# Altium PCB main.PcbDoc (part 1 of 2)
Units mm, origin at the board's own origin, x right, y up, seen from the top; angles counter-clockwise.
Board outline 98 x 96 mm, 4 copper layers (Top Layer, PWR Layer, GND Layer, Bottom Layer), stack 0.603 mm thick; 82 components, 71 nets, 386 pads, 153 vias.
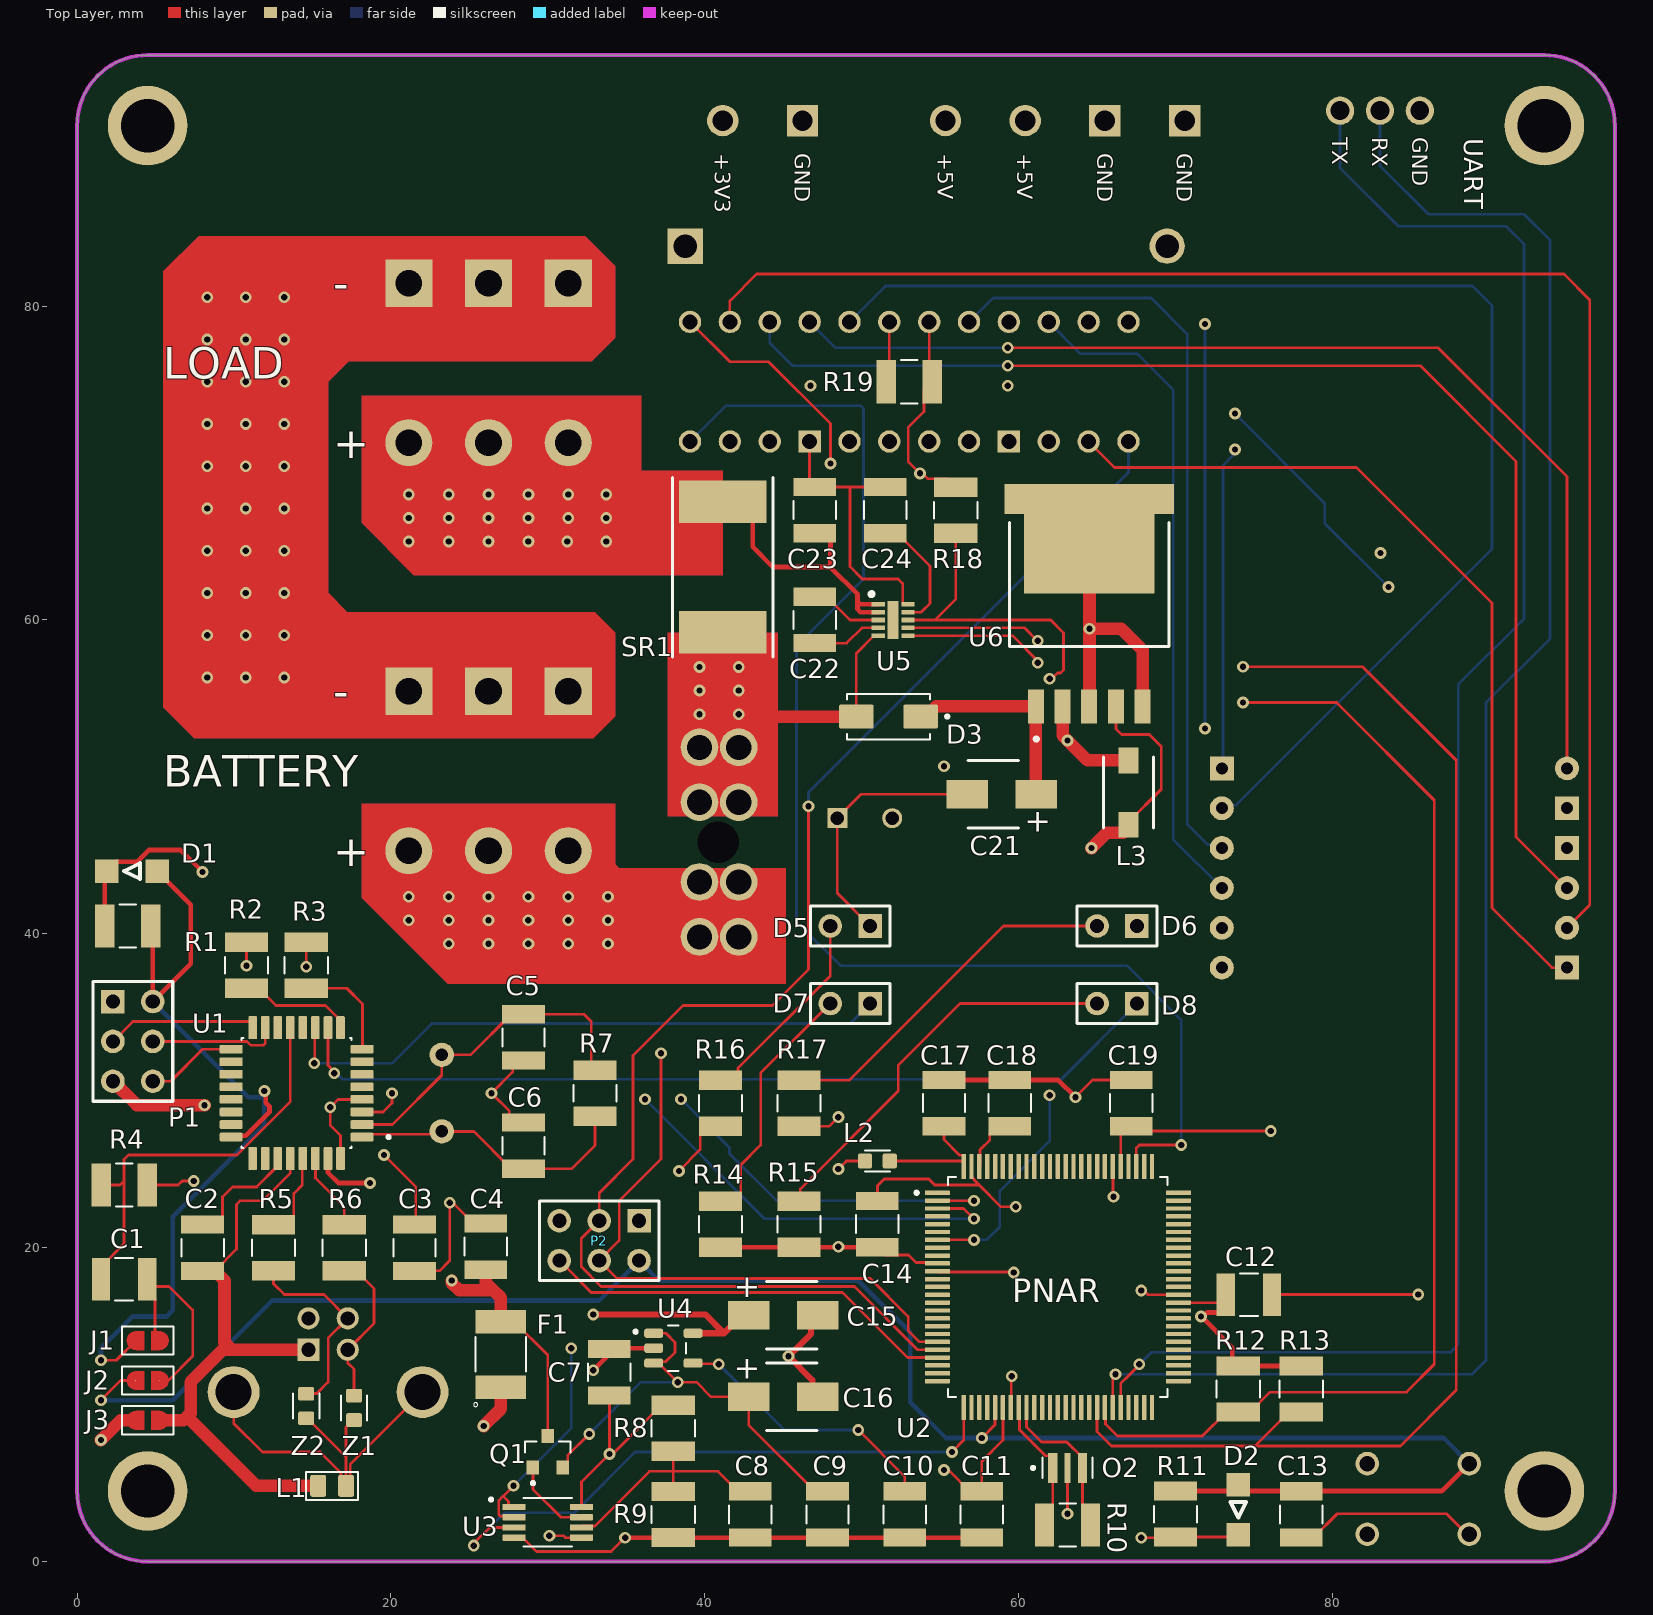
[diagram p0: Top Layer view]
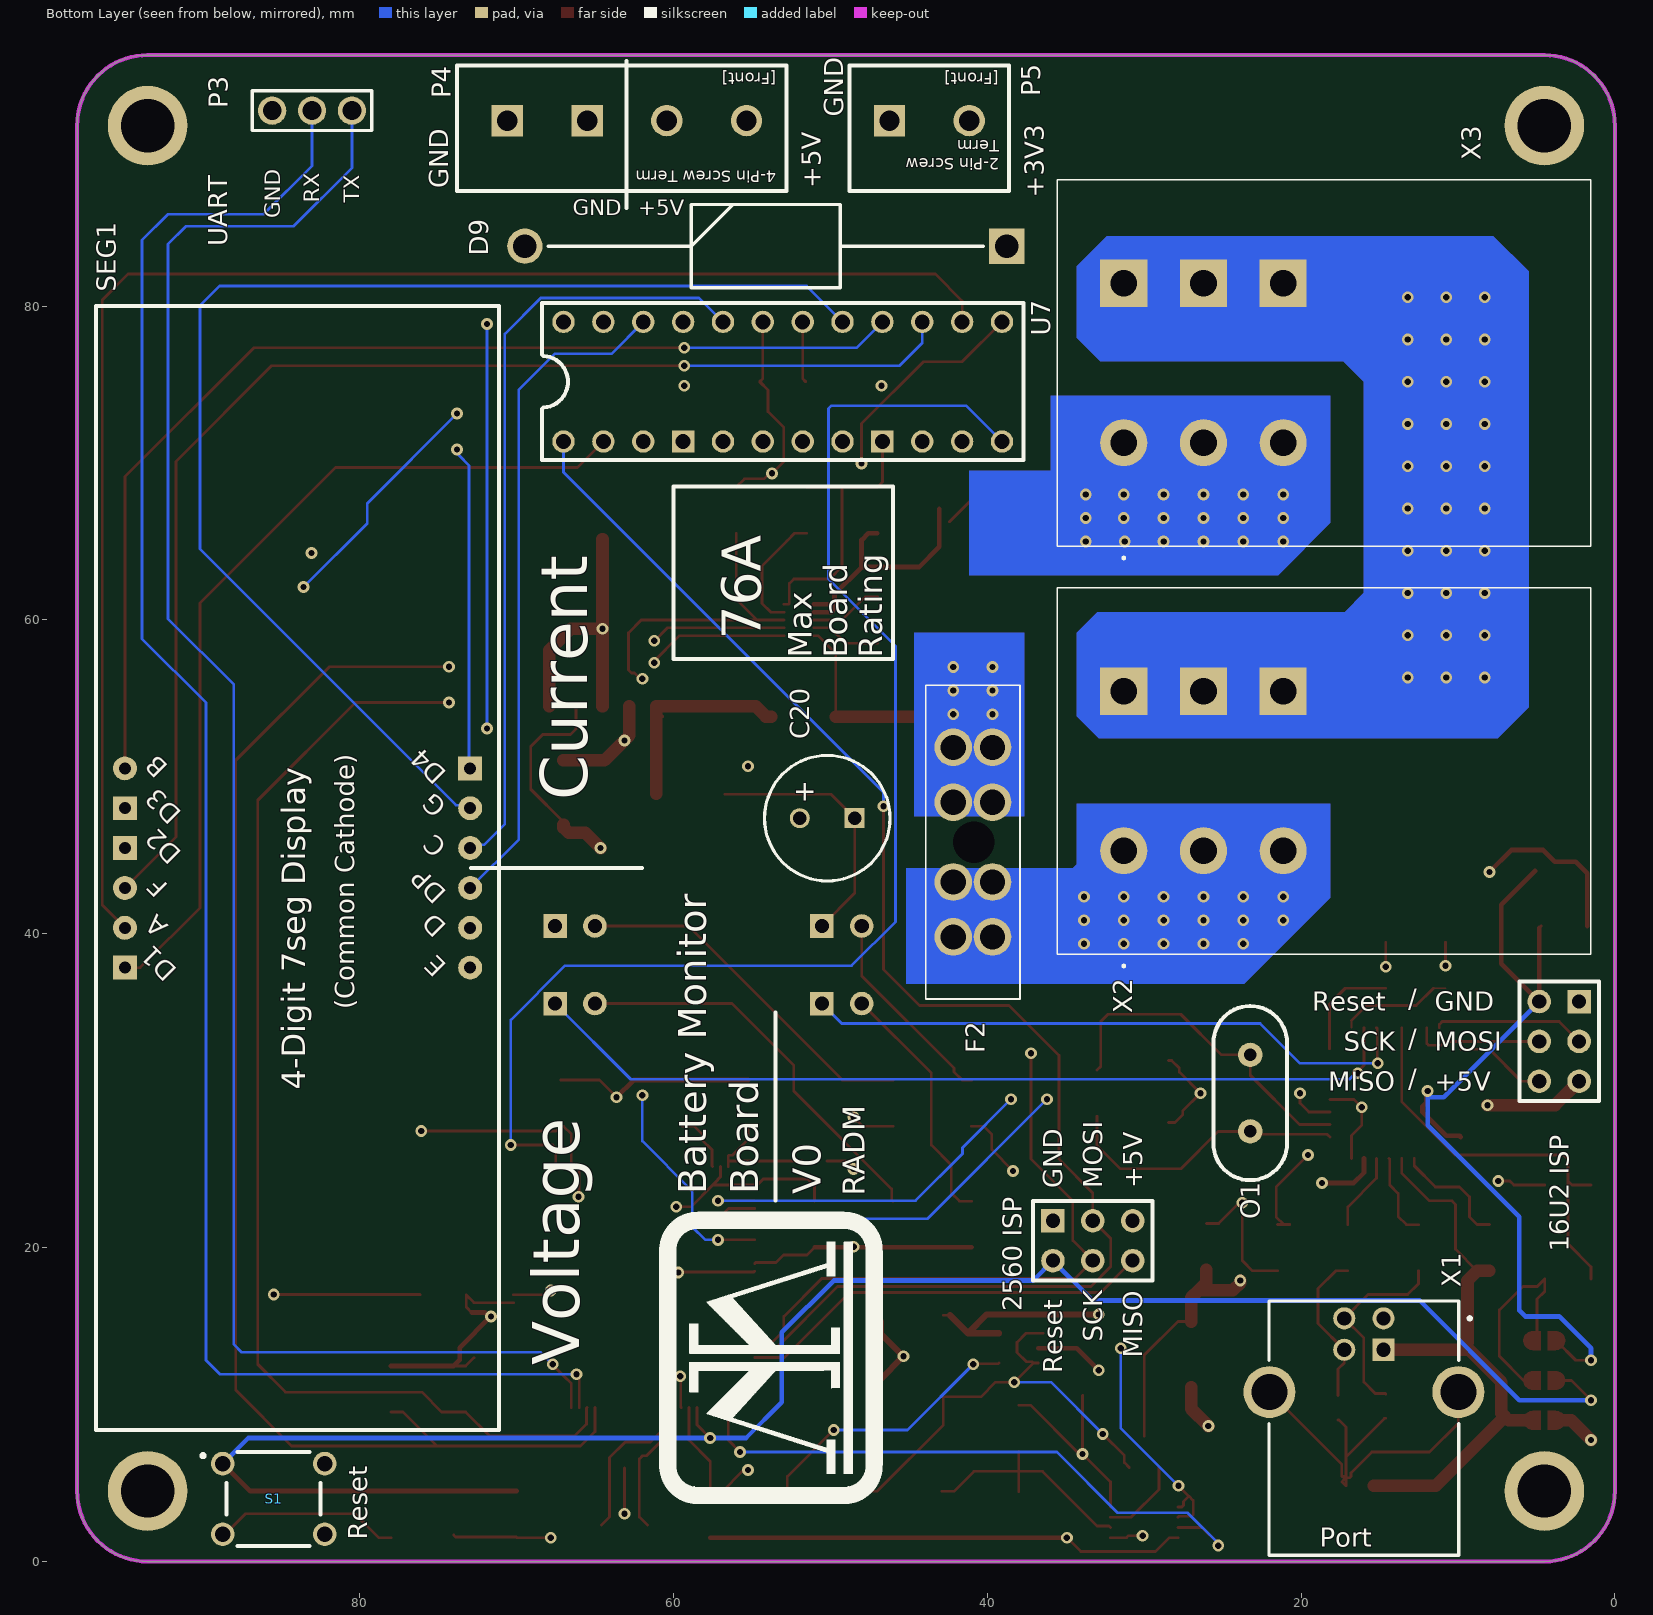
[diagram p1: Bottom Layer view, seen from below]
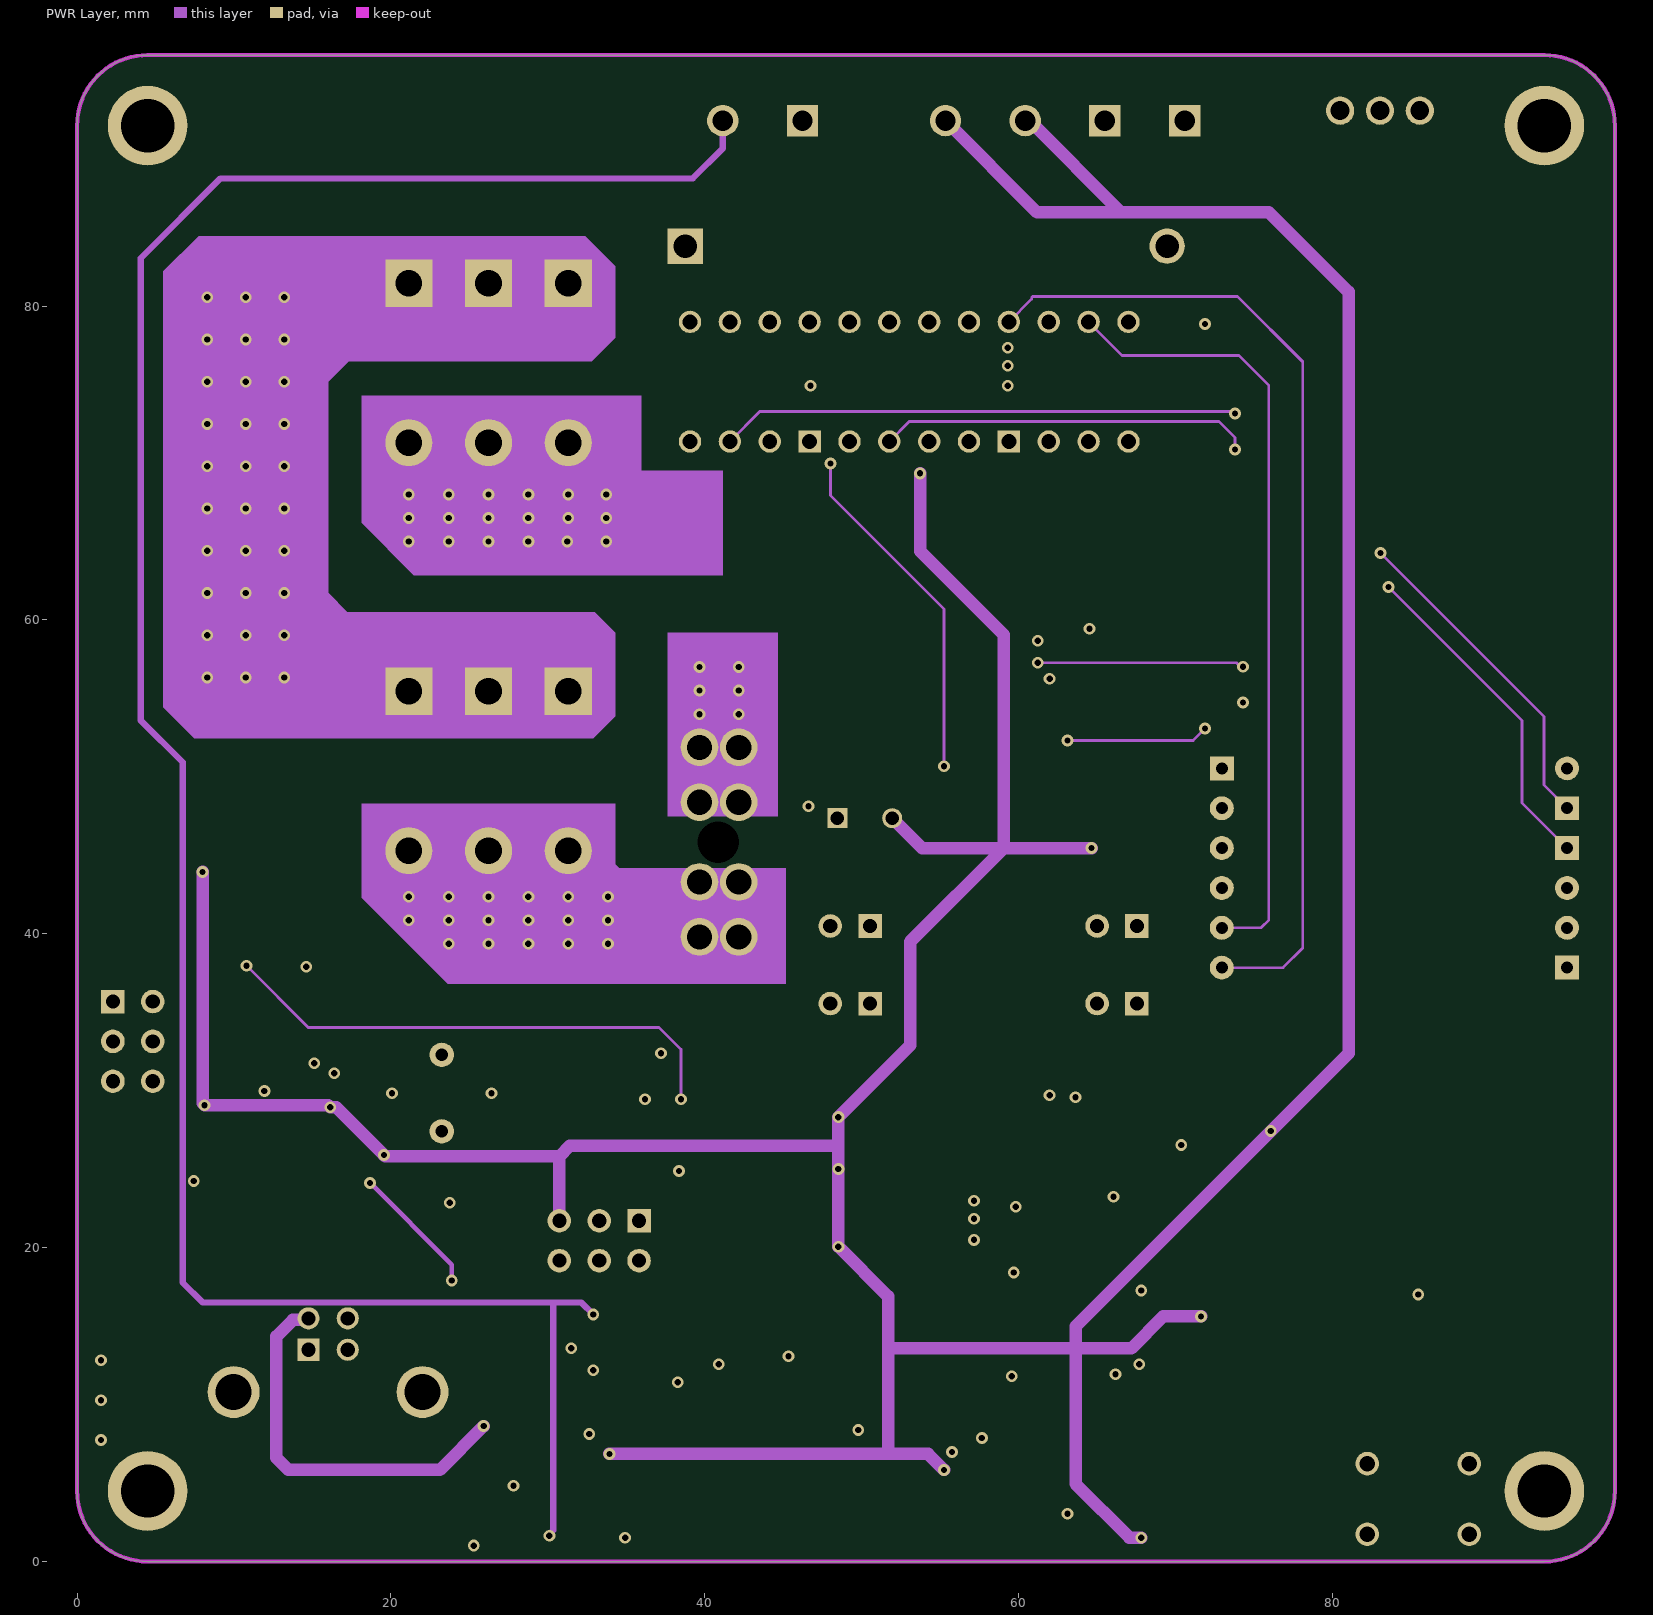
[diagram p2: PWR Layer]
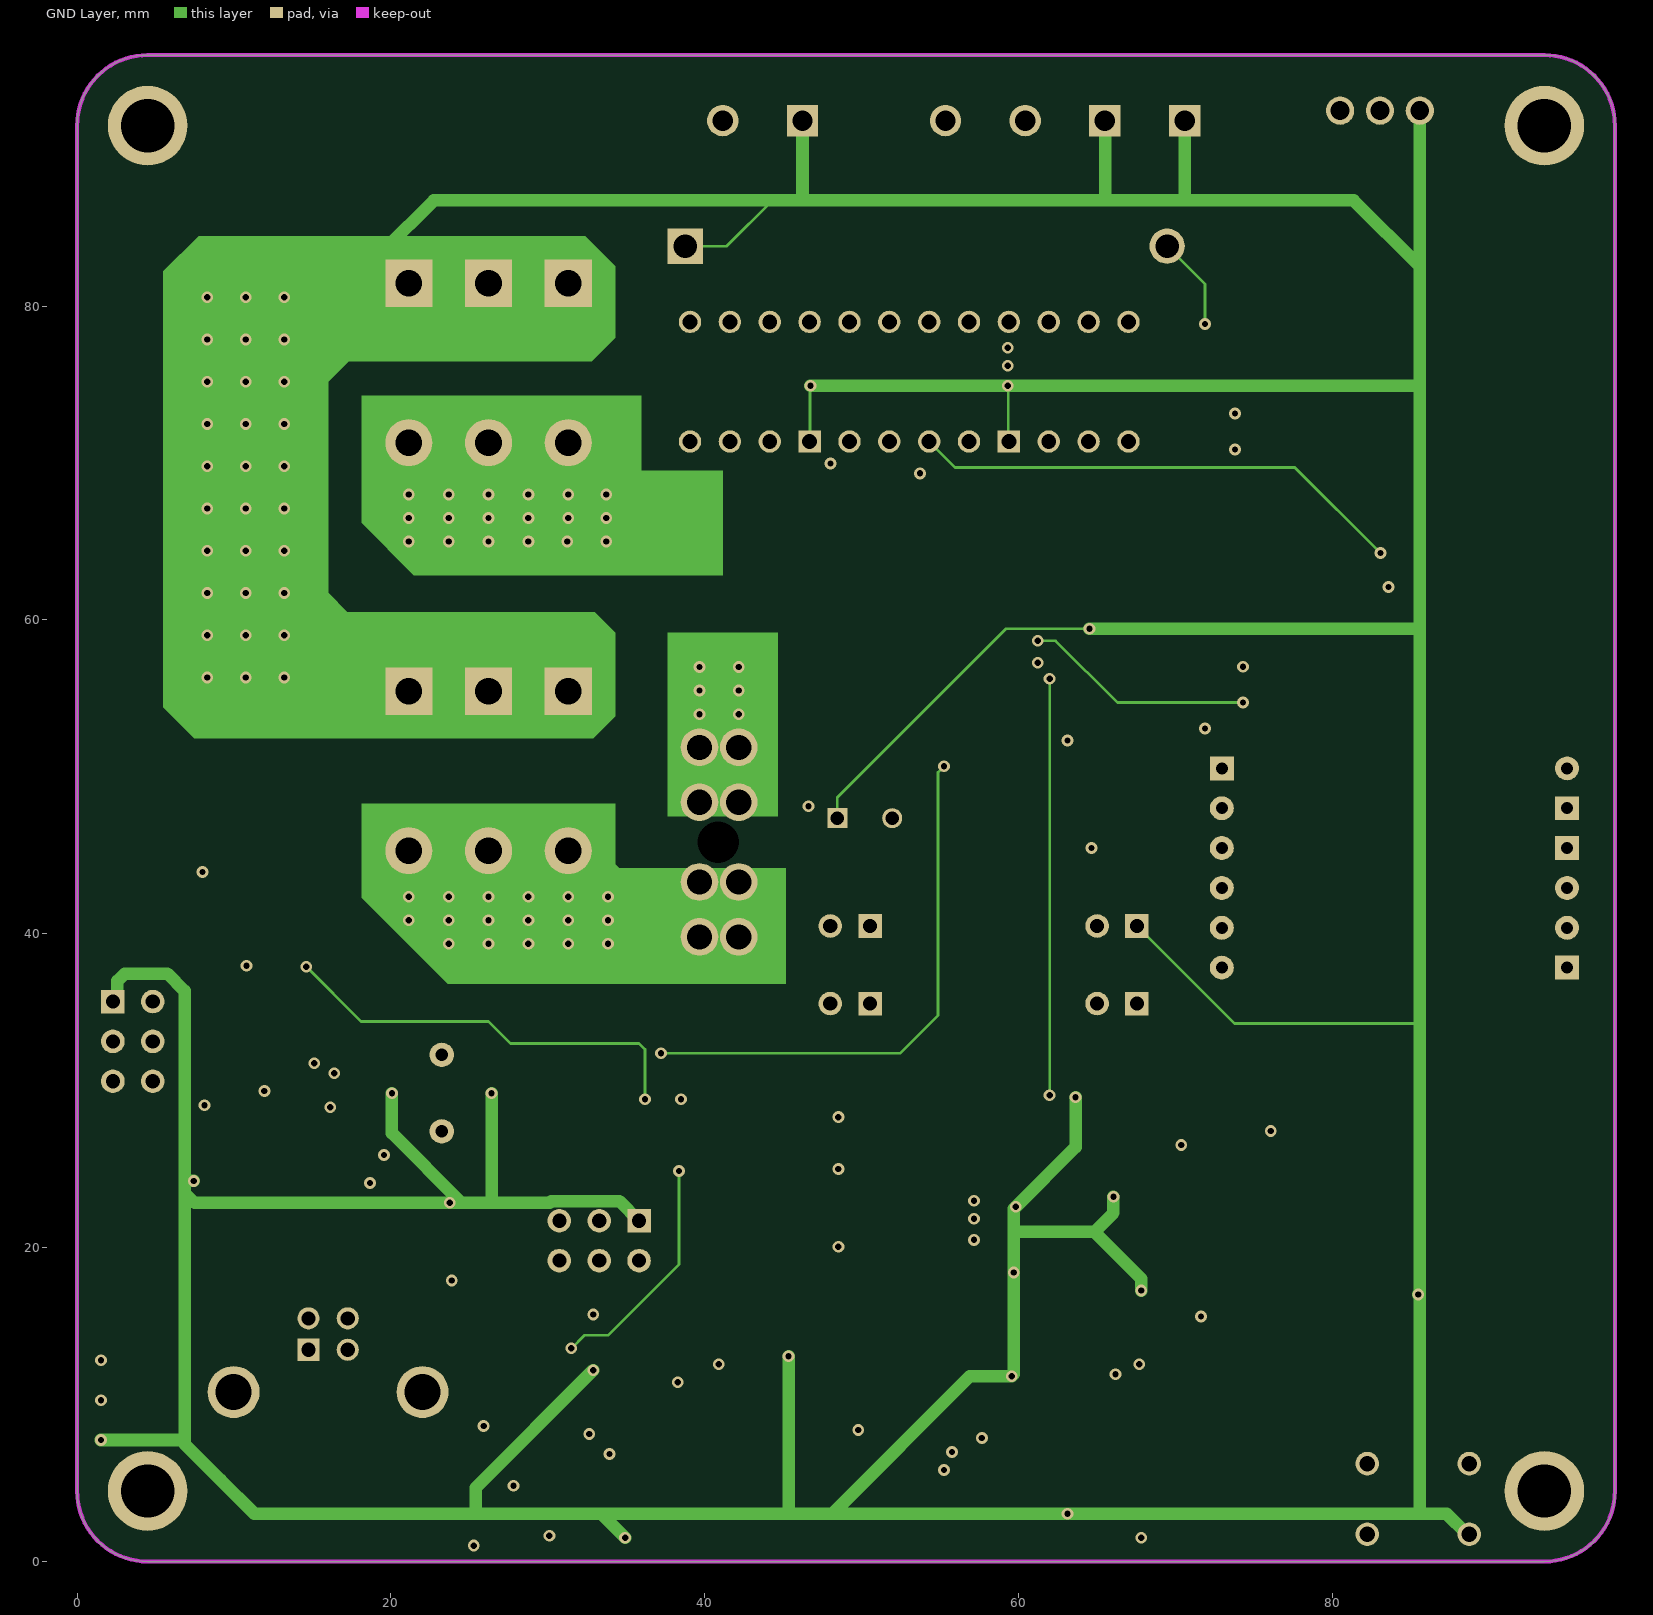
[diagram p3: GND Layer]

## Layer stack, top to bottom
Top Solder: solder mask 0.0102, Solder Resist, Dk 3.5
Top Layer: signal copper 0.0356
Dielectric 2: prepreg 0.0711, PP-006, Dk 4.1
PWR Layer: signal copper 0.035
Dielectric 1: dielectric 0.32, FR-4, Dk 4.8
GND Layer: signal copper 0.035
Dielectric 3: prepreg 0.0711, PP-006, Dk 4.1
Bottom Layer: signal copper 0.0356
Bottom Solder: solder mask 0.0102, Solder Resist, Dk 3.5

## Board outline
0,4.5 0,91.5 cw(c4.5,91.5) 4.5,96 93.5,96 cw(c93.5,91.5) 98,91.5 98,4.5 cw(c93.5,4.5) 93.5,0 4.5,0 cw(c4.5,4.5)

## Design rules (kind name [scope] priority, off if disabled: settings)
BoardOutlineClearance [All] p1: gap=0.2 ignorepadtopadclearanceinfootprint=FALSE
Clearance [All] p1: gap=0.102 ignorepadtopadclearanceinfootprint=FALSE except(0.127: Arc-Via Track-Via SMDPad-Via THPad-Via Via-Via Via-Fill Via-Poly Via-Region Via-Text; 0.25: Arc-Hole Track-Hole SMDPad-Hole THPad-Hole Via-Hole Fill-Hole Poly-Hole Region-Hole Text-Hole)
ComponentClearance [All] p1: gap=0.102 collisioncheckmode=3 verticalgap=0.102 showdistances=TRUE
DiffPairsRouting [All] p1: maxlimit=0.102 minlimit=0.102 mostfreqgap=0.102 toplayer_minwidth=0.102 toplayer_maxwidth=1816.048 toplayer_prefwidth=0.102 midlayer1_minwidth=0.102 midlayer1_maxwidth=1816.048 midlayer1_prefwidth=0.102 midlayer2_minwidth=0.102 midlayer2_maxwidth=1816.048 midlayer2_prefwidth=0.102 bottomlayer_minwidth=0.102 bottomlayer_maxwidth=1816.048 bottomlayer_prefwidth=0.102 maxuncoupledlength=12.7
Height [All] p1: minheight=0 maxheight=1816.048 prefheight=12.7
HoleSize [All] p1: absolutevalues=TRUE maxlimit=6.3 minlimit=0.2 maxpercent=80.000 minpercent=20.000
HoleToHoleClearance [All] p1: gap=0.25 allowstackedmicrovias=FALSE
MinimumAnnularRing [All] p1: minimumring=0.076
MinimumSolderMaskSliver [All] p1: minsoldermaskwidth=0
PlaneClearance [All] p1: clearance=0.102
PlaneConnect PlaneConnectPowerPads [InPadClass('PowerPads')] p1: planeconnectstyle=Direct reliefexpansion=0.508 reliefentries=4 reliefconductorwidth=0.254 reliefairgap=0.254
PlaneConnect [All] p2: pad.planeconnectstyle=Relief pad.reliefexpansion=0.3 pad.reliefentries=4 pad.reliefconductorwidth=0.102 pad.reliefairgap=0.102 via.planeconnectstyle=Direct via.reliefexpansion=0.3 via.reliefentries=4 via.reliefconductorwidth=0.127 via.reliefairgap=0.127
PolygonConnect PolygonConnectPowerPads [All vs (InPadClass('PowerPads'))] p1: connectstyle=Direct reliefconductorwidth=0.254 reliefentries=4 polygonreliefangle="90 Angle" airgapwidth=0.254
PolygonConnect [All] p2: thpad.connectstyle=Relief thpad.reliefconductorwidth=0.102 thpad.reliefentries=4 thpad.polygonreliefangle="90 Angle" thpad.airgapwidth=0.102 smdpad.connectstyle=Relief smdpad.reliefconductorwidth=0.102 smdpad.reliefentries=4 smdpad.polygonreliefangle="90 Angle" smdpad.airgapwidth=0.102 via.connectstyle=Direct via.reliefconductorwidth=0.127 via.reliefentries=4 via.polygonreliefangle="90 Angle" via.airgapwidth=0.127
RoutingVias [All] p1: holewidth=0.2 width=0.45 viastyle="Through Hole" minholewidth=0.2 minwidth=0.45 maxholewidth=6.3 maxwidth=6.55
SilkToSilkClearance [All] p1: silktosilkclearance=0
SilkToSolderMaskClearance [IsPad] p1: minsilkscreentomaskgap=0.102 clearancetoexposedcopper=TRUE
SolderMaskExpansion [All] p1: expansion=0.075 istentingtop=FALSE
SupplyNets "Schematic Supply Nets_3" [InNet('16U2_AVCC')] p1: voltage=0.000
SupplyNets "Schematic Supply Nets_2" [InNet('U3 GND')] p2: voltage=0.000
SupplyNets "Schematic Supply Nets_1" [InNet('+3V3')] p3: voltage=0.000
Width [All] p1: maxlimit=1816.048 minlimit=0.102 preferedwidth=0.175
20 further rules are at their usual default settings.

## Classes and differential pairs
component class "Seven-Seg Displays": R19 SEG1 U7
component class "USB Programmer": C1 C2 C3 C4 C5 C6 D1 D7 D8 F1 J1 J2 J3 L1 O1 P1 R1 R2 R3 R4 R5 R6 R7 R14 R15 U1 X1 Z1 Z2
component class "Primary MCU": C7 C8 C9 C10 C11 C12 C13 C14 C15 C16 C17 C18 C19 D2 D5 D6 L2 O2 P2 P3 Q1 R8 R9 R10 R11 R12 R13 R16 R17 S1 U2 U3 U4
component class "DC Step-Down Converter": C20 C21 D3 D9 L3 P4 P5 U6
component class "Battery Monitoring": C22 C23 C24 F2 R18 SR1 U5 X2 X3

## Components (designator, comment, footprint, x,y, rotation, side; value= is the part's Value field where it differs from the comment)
C1 "SMD Cap - Nonpolarized" "SMD Capacitor [1210]" 3,18 r0 top
C2 "SMD Cap - Nonpolarized" "SMD Capacitor [1210]" 8,20 r90 top
C3 "SMD Cap - Nonpolarized" "SMD Capacitor [1210]" 21.5,20 r90 top
C4 "SMD Cap - Nonpolarized" "SMD Capacitor [1210]" 26.035,20.066 r90 top
C5 "SMD Cap - Nonpolarized" "SMD Capacitor [1210]" 28.448,33.401 r270 top
C6 "SMD Cap - Nonpolarized" "SMD Capacitor [1210]" 28.448,26.5 r90 top
C7 "SMD Cap - Nonpolarized" "SMD Capacitor [1210]" 33.909,12.065 r270 top
C8 "SMD Cap - Nonpolarized" "SMD Capacitor [1210]" 42.9,3 r90 top
C9 "SMD Cap - Nonpolarized" "SMD Capacitor [1210]" 47.819,3 r90 top
C10 "SMD Cap - Nonpolarized" "SMD Capacitor [1210]" 52.739,3 r90 top
C11 "SMD Cap - Nonpolarized" "SMD Capacitor [1210]" 57.658,3 r90 top
C12 "SMD Cap - Nonpolarized" "SMD Capacitor [1210]" 74.675,17 r180 top
C13 "SMD Cap - Nonpolarized" "SMD Capacitor [1210]" 78,3 r90 top
C14 "SMD Cap - Nonpolarized" "SMD Capacitor [1210]" 51,21.5 r270 top
C15 "SMD Cap - Polarized" "SMD Cap - Polarized, 4mm" 45,15.7 r0 top
C16 "SMD Cap - Polarized" "SMD Cap - Polarized, 4mm" 45,10.5 r0 top
C17 "SMD Cap - Nonpolarized" "SMD Capacitor [1210]" 55.245,29.21 r270 top
C18 "SMD Cap - Nonpolarized" "SMD Capacitor [1210]" 59.436,29.21 r270 top
C19 "SMD Cap - Nonpolarized" "SMD Capacitor [1210]" 67.183,29.21 r270 top
C20 "Thru-Hole Cap - Polarized" "Thru-Hole Polarized Cap [3.5mm]" 50.193,47.353 r180 bottom
C21 "SMD Cap - Polarized" "SMD Cap - Polarized, 4mm" 58.928,48.895 r180 top
C22 "SMD Cap - Nonpolarized" "SMD Capacitor [1210]" 47,60 r270 top
C23 "SMD Cap - Nonpolarized" "SMD Capacitor [1210]" 47,67.001 r270 top
C24 "SMD Cap - Nonpolarized" "SMD Capacitor [1210]" 51.5,67 r90 top
D1 "SMD Diode" "SMD Diode [1206]" 3.5,44 r180 top
D2 "SMD Diode" "SMD Diode [1206]" 74,3.295 r270 top
D3 "SMD M7 Rectifier" "SMD M7 Rectifier" 51.707,53.848 r180 top
D5 "LED" "Small Yellow LED" 48,40.5 r0 top
D6 "LED" "Small Green LED" 65,40.5 r0 top
D7 "LED" "Small Yellow LED" 48,35.56 r0 top
D8 "LED" "Small Yellow LED" 65,35.56 r0 top
D9 "1N5822" "1N5822 Schottky Diode" 54.113,83.82 r180 bottom
F1 "SMD 500mA Resetable Fuse" "SMD 500mA Resetable Fuse" 27,13.197 r90 top
F2 "Blade Fuse" "Blade Fuse [2]" 40.914,45.847 r270 bottom
J1 "Solderable Jumper" "Solderable Jumper" 4.5,14.08 r180 top
J2 "Solderable Jumper" "Solderable Jumper" 4.5,11.54 r180 top
J3 "Solderable Jumper" "Solderable Jumper" 4.5,9 r0 top
L1 "SMD Ferrite Bead" "SMD Ferrite Bead [0805]" 16.256,4.826 r180 top
L2 "SMD Inductor" "SMD Inductor [0603]" 51,25.527 r180 top
L3 "SMD Inductor" "SMD Inductor [1812]" 67,49 r270 top
O1 "Thru-Hole 16MHz Oscillator" "Thru-Hole 16MHz Oscillator" 23.241,29.851 r90 bottom
O2 "SMD 16MHz Oscillator" "SMD 16MHz Oscillator [1]" 63.119,5.969 r0 top
P1 "Header 3X2" HDR2X3 4.826,30.607 r90 top
P2 "Header 3X2" HDR2X3 30.734,19.177 r0 top
P3 "JST Female 3 Pin" "Jst Female 3pin" 80.486,92.456 r0 bottom
P4 "4pin Screw Terminal" "Screw Terminal [4pin]" 55.34,91.821 r0 bottom
P5 "Screw Terminal [2pin]" "Screw Terminal [2pin]" 41.148,91.821 r0 bottom
Q1 "SMD Mosfet (Part #: PMV48XP)" "SMD Mosfet (Part #: PMV48XP)" 30,7 r90 top
R1 "SMD Resistor" "SMD Resistor [1210]" 3.233,40.5 r180 top
R2 "SMD Resistor" "SMD Resistor [1210]" 10.8,38 r270 top
R3 "SMD Resistor" "SMD Resistor [1210]" 14.6,38 r270 top
R4 "SMD Resistor" "SMD Resistor [1210]" 3,24 r0 top
R5 "SMD Resistor" "SMD Resistor [1210]" 12.52,20 r90 top
R6 "SMD Resistor" "SMD Resistor [1210]" 17.02,20 r90 top
R7 "SMD Resistor" "SMD Resistor [1210]" 33,29.851 r90 top
R8 "SMD Resistor" "SMD Resistor [1210]" 38,8.5 r90 top
R9 "SMD Resistor" "SMD Resistor [1210]" 38,3 r90 top
R10 "SMD Resistor" "SMD Resistor [1210]" 63.119,2.325 r0 top
R11 "SMD Resistor" "SMD Resistor [1210]" 70,3.026 r270 top
R12 "SMD Resistor" "SMD Resistor [1210]" 74,11 r90 top
R13 "SMD Resistor" "SMD Resistor [1210]" 78,11 r90 top
R14 "SMD Resistor" "SMD Resistor [1210]" 41,21.5 r270 top
R15 "SMD Resistor" "SMD Resistor [1210]" 46.01,21.5 r270 top
R16 "SMD Resistor" "SMD Resistor [1210]" 41,29.21 r270 top
R17 "SMD Resistor" "SMD Resistor [1210]" 46.01,29.21 r270 top
R18 "SMD Resistor" "SMD Resistor [1210]" 56,67 r270 top
R19 "SMD Resistor" "SMD Resistor [1210]" 53.03,75.184 r180 top
S1 "Thru-Hole Pushbutton" "Thru-Hole Pushbutton" 85.471,3.992 r180 bottom
SEG1 "7seg Display [4-Digit]" "7seg Display [4 Digit]" 83.947,44.196 r90 bottom
SR1 "SMD Resistor" "SMD Resistor [3921]" 41.148,63.373 r90 top
U1 "[MCU] ATMega16U2_AUR" "SMD ATMega16U2_AUR" 13.991,29.851 r180 top
U2 "[MCU] ATMega2560_AU" "SMD ATMega2560_AU" 62.5,17.5 r0 top locked
U3 "SMD Dual Op-Ap" "SMD Dual Op-Ap (LMV358IDGKR)" 30,2.5 r0 top
U4 "SMD 3V3 Regulator" "SMD 3V3 Regulator" 38,13.6 r0 top
U5 "LTC2959" "Battery Monitor IC" 52,60 r0 top
U6 "LM2576" "LM2576 Step Down Converter" 64.5,60.5 r270 top
U7 "LED Driver" "DIP IC [24pin, IC]" 67,71.374 r90 bottom
X1 "USB Type-B Female (Thru-Hole)" "USB Type-B Female (Thru-Hole)" 16,8.5 r180 bottom
X2 "1996236" "Screw Terminal [1996236]" 31.3,45.3 r90 bottom
X3 "1996236" "Screw Terminal [1996236]" 31.3,71.3 r90 bottom
Z1 "SMD Varistor" "SMD Varistor [0603]" 17.653,9.797 r90 top
Z2 "SMD Varistor" "SMD Varistor [0603]" 14.605,9.906 r90 top

## Footprints (in the part's own frame and the unit in brackets; to place one, negate y for a bottom-side part, rotate by r counter-clockwise, add the part's x,y. Pads: shape width x height; smd on the part's side, far side on the other; paste and mask are expansions set on the pad)
"1N5822 Schottky Diode" [mm]
  round 2.25 hole 1.5: 1(-15.35,0)
  rect 2.25x2.25 hole 1.5: 2(15.35,0)
  silkscreen extent -13.87,-2.65 13.88,2.65, body extent -16,-2.65 16,2.65, height 5.29
"7seg Display [4 Digit]" [mil]
  round 60 hole 30: 1(-250,-433.07) 2(-150,-433.07) 3(-50,-433.07) 4(50,-433.07) 5(150,-433.07) 7(250,433.07) 10(-50,433.07) 11(-150,433.07)
  rect 60x60 hole 30: 6(250,-433.07) 8(150,433.07) 9(50,433.07) 12(-250,433.07)
  silkscreen extent -1409,-506 1409,506, body extent -1415,-510 1415,510, height 354
"Battery Monitor IC" [mm] "LTC2959"
  rect 0.85x0.3 smd: 1(-0.95,1) 2(-0.95,0.5) 3(-0.95,0) 4(-0.95,-0.5) 5(-0.95,-1) 6(0.95,-1) 7(0.95,-0.5) 8(0.95,0) 9(0.95,0.5) 10(0.95,1)
  rect 0.69x2.44 smd: 11(0,0)
  silkscreen extent -1.5,1.53 -1.25,1.77, body extent -1.05,-1.5 1.05,1.5, height 0.8
"Blade Fuse [2]" [mm]
  round 2.4 hole 1.6: 1(-6.04,-1.25) 1(-6.04,1.25) 1(-2.54,-1.25) 1(-2.54,1.25) 2(2.54,-1.25) 2(2.54,1.25) 2(6.04,-1.25) 2(6.04,1.25)
  round 1.325 hole 2.65 unplated: ""(0,0.045)
  silkscreen extent -10,-3 10,3, body extent -10,-3 10,3, height 18.03
"DIP IC [24pin, IC]" [mm]
  round 1.425 hole 0.95: 1(0,0) 2(0,-2.54) 3(0,-5.08) 5(0,-10.16) 6(0,-12.7) 7(0,-15.24) 8(0,-17.78) 10(0,-22.86) 11(0,-25.4) 12(0,-27.94) 13(7.62,-27.94) 14(7.62,-25.4) 15(7.62,-22.86) 16(7.62,-20.32) 17(7.62,-17.78) 18(7.62,-15.24) 19(7.62,-12.7) 20(7.62,-10.16) 21(7.62,-7.62) 22(7.62,-5.08) 23(7.62,-2.54) 24(7.62,0)
  rect 1.425x1.425 hole 0.95: 4(0,-7.62) 9(0,-20.32)
  silkscreen extent -1.19,-29.31 8.81,1.37, body extent -0.76,-29.03 8.38,1.09, height 3.6
HDR2X3 [mm] "Connector; Header; 3x2 Position"
  round 1.5 hole 0.9: 1(0,0) 2(0,2.54) 3(2.54,0) 4(2.54,2.54) 5(5.08,0)
  rect 1.5x1.5 hole 0.9: 6(5.08,2.54)
  silkscreen extent -1.27,-1.27 6.35,3.81
"Jst Female 3pin" [mm]
  round 1.8 hole 1.2: 1(0,0) 2(2.54,0) 3(5.08,0)
  silkscreen extent -1.27,-1.27 6.35,1.27, body extent -2.47,-2.33 7.41,3.42, height 7.88
"LM2576 Step Down Converter" [mm]
  rect 2.16x1.02 smd: 1(6,-3.4) 2(6,-1.7) 3(6,0) 4(6,1.7) 5(6,3.4)
  rect 1.91x1.235 smd: 6(-7.215,4.782) 6(-7.215,-4.782)
  rect 6.99x8.33 smd: 6(-4.675,0)
  silkscreen extent -5.71,-5.08 8.22,5.08, body extent -7.57,-5.08 6.78,5.08, height 4.72
"Screw Terminal [2pin]" [mm]
  round 2 hole 1.3: 1(0,0)
  rect 2x2 hole 1.3: 2(5.08,0)
  silkscreen extent -2.54,-3.5 7.62,4.5, body extent -2.95,-3.5 7.55,4.1, height 9.99
"Screw Terminal [4pin]" [mm]
  round 2 hole 1.3: 1(0,0) 2(5.08,0)
  rect 2x2 hole 1.3: 3(10.16,0) 4(15.24,0)
  silkscreen extent -2.54,-3.5 18.46,4.5, body extent -2.95,-3.5 17.75,4.1, height 9.99
"Screw Terminal [1996236]" [mm]
  round 3 hole 1.7: 1(0,-10.16) 1(0,-5.08) 1(0,0)
  rect 3x3 hole 1.7: 2(10.16,-10.16) 2(10.16,-5.08) 2(10.16,0)
  silkscreen extent -7.4,-29.76 16.76,4.24, body extent -6.49,-29.76 16.87,4.24, height 13.4
"Small Green LED" [mm]
  round 1.5 hole 0.9: 1(0,0)
  rect 1.5x1.5 hole 0.9: 2(2.54,0)
  silkscreen extent -1.27,-1.27 3.81,1.27, body extent -0.63,-1.92 2.95,1.92, height 5.6
"Small Yellow LED" [mm]
  round 1.5 hole 0.9: 1(0,0)
  rect 1.5x1.5 hole 0.9: 2(2.54,0)
  silkscreen extent -1.27,-1.27 3.81,1.27, body extent -0.63,-1.92 2.95,1.92, height 5.6
"SMD 3V3 Regulator" [mm] "Part #: LP2985-33DBVR"
  rrect50% 1.21x0.59 smd: 1(-1.255,0.95) 2(-1.255,0) 3(-1.255,-0.95) 4(1.255,-0.95) 5(1.255,0.95)
  silkscreen extent -2.51,-1.45 0.8,1.45, body extent -1.4,-1.45 1.4,1.45, height 1.45
"SMD 16MHz Oscillator [1]" [mm] "CSTCE16M0V53-R0"
  rect 0.6x1.9 smd: 1(-0.95,0) 3(0.95,0)
  rect 0.4x1.9 smd: 2(0,0)
  silkscreen extent -2.3,-0.65 1.6,0.65, body extent -1.6,-0.65 1.6,0.65, height 1
"SMD 500mA Resetable Fuse" [mm] "Part #: MF-MSMF050-2"
  rect 1.5x3.2 smd: 1(-2.1,0) 2(2.1,0)
  silkscreen extent -3.33,-1.6 1.1,1.73, body extent -2.27,-1.62 2.27,1.62, height 1.1
"SMD ATMega16U2_AUR" [mm]
  rrect25% 1.47x0.55 smd: 1(-4.17,2.8) 2(-4.17,2) 3(-4.17,1.2) 4(-4.17,0.4) 5(-4.17,-0.4) 6(-4.17,-1.2) 7(-4.17,-2) 8(-4.17,-2.8) 17(4.17,-2.8) 18(4.17,-2) 19(4.17,-1.2) 20(4.17,-0.4) 21(4.17,0.4) 22(4.17,1.2) 23(4.17,2) 24(4.17,2.8)
  rrect25% 0.55x1.47 smd: 9(-2.8,-4.17) 10(-2,-4.17) 11(-1.2,-4.17) 12(-0.4,-4.17) 13(0.4,-4.17) 14(1.2,-4.17) 15(2,-4.17) 16(2.8,-4.17) 25(2.8,4.17) 26(2,4.17) 27(1.2,4.17) 28(0.4,4.17) 29(-0.4,4.17) 30(-1.2,4.17) 31(-2,4.17) 32(-2.8,4.17)
  silkscreen extent -5.96,-3.5 3.5,3.5, body extent -4.5,-4.5 4.5,4.5, height 1.2
"SMD ATMega2560_AU" [mm]
  rrect25% 1.6x0.28 smd: 1(-7.68,6) 2(-7.68,5.5) 3(-7.68,5) 4(-7.68,4.5) 5(-7.68,4) 6(-7.68,3.5) 7(-7.68,3) 8(-7.68,2.5) 9(-7.68,2) 10(-7.68,1.5) 11(-7.68,1) 12(-7.68,0.5) 13(-7.68,0) 14(-7.68,-0.5) 15(-7.68,-1) 16(-7.68,-1.5) 17(-7.68,-2) 18(-7.68,-2.5) 19(-7.68,-3) 20(-7.68,-3.5) 21(-7.68,-4) 22(-7.68,-4.5) 23(-7.68,-5) 24(-7.68,-5.5) 25(-7.68,-6) 51(7.68,-6) 52(7.68,-5.5) 53(7.68,-5) 54(7.68,-4.5) 55(7.68,-4) 56(7.68,-3.5) 57(7.68,-3) 58(7.68,-2.5) 59(7.68,-2) 60(7.68,-1.5) 61(7.68,-1) 62(7.68,-0.5) 63(7.68,0) 64(7.68,0.5) 65(7.68,1) 66(7.68,1.5) 67(7.68,2) 68(7.68,2.5) 69(7.68,3) 70(7.68,3.5) 71(7.68,4) 72(7.68,4.5) 73(7.68,5) 74(7.68,5.5) 75(7.68,6)
  rrect25% 0.28x1.6 smd: 26(-6,-7.68) 27(-5.5,-7.68) 28(-5,-7.68) 29(-4.5,-7.68) 30(-4,-7.68) 31(-3.5,-7.68) 32(-3,-7.68) 33(-2.5,-7.68) 34(-2,-7.68) 35(-1.5,-7.68) 36(-1,-7.68) 37(-0.5,-7.68) 38(0,-7.68) 39(0.5,-7.68) 40(1,-7.68) 41(1.5,-7.68) 42(2,-7.68) 43(2.5,-7.68) 44(3,-7.68) 45(3.5,-7.68) 46(4,-7.68) 47(4.5,-7.68) 48(5,-7.68) 49(5.5,-7.68) 50(6,-7.68) 76(6,7.68) 77(5.5,7.68) 78(5,7.68) 79(4.5,7.68) 80(4,7.68) 81(3.5,7.68) 82(3,7.68) 83(2.5,7.68) 84(2,7.68) 85(1.5,7.68) 86(1,7.68) 87(0.5,7.68) 88(0,7.68) 89(-0.5,7.68) 90(-1,7.68) 91(-1.5,7.68) 92(-2,7.68) 93(-2.5,7.68) 94(-3,7.68) 95(-3.5,7.68) 96(-4,7.68) 97(-4.5,7.68) 98(-5,7.68) 99(-5.5,7.68) 100(-6,7.68)
  silkscreen extent -9.1,-7 7,7, body extent -8.13,-8.13 8.13,8.13, height 1.2
"SMD Cap - Polarized, 4mm" [mm]
  rect 2.65x1.8 smd: 1(-2.2,0) 2(2.2,0)
  silkscreen extent -1.07,-2.15 2.15,2.15, body extent -2.6,-2.25 2.6,2.25, height 5.66
"SMD Capacitor [1210]" [mm]
  rect 1.16x2.72 smd: 1(-1.475,0) 2(1.475,0)
  silkscreen extent -0.57,-1.35 0.57,1.35, body extent -1.6,-1.25 1.6,1.25, height 1.9
"SMD Diode [1206]" [mm]
  rect 1.5x1.5 smd: A(-1.6,0) C(1.6,0)
  silkscreen extent -0.5,-0.5 0.5,0.5, body extent -1.5,-0.65 1.5,0.65, height 0.75
"SMD Dual Op-Ap (LMV358IDGKR)" [mm]
  rrect25% 1.47x0.4 smd: 1(-2.15,0.975) 2(-2.15,0.325) 3(-2.15,-0.325) 4(-2.15,-0.975) 5(2.15,-0.975) 6(2.15,-0.325) 7(2.15,0.325) 8(2.15,0.975)
  silkscreen extent -3.72,-1.55 1.55,1.55, body extent -2.45,-1.5 2.45,1.5, height 1.1
"SMD Ferrite Bead [0805]" [mil]
  rrect25% 40x55 smd: 1(-35,0) 2(35,0)
  silkscreen extent -65,-35 65,35, body extent -39,-24 39,24, height 43
"SMD Inductor [0603]" [mm]
  rrect30% 0.9x0.97 smd: 1(-0.785,0) 2(0.785,0)
  silkscreen extent -0.8,-0.66 0.8,0.66, body extent -0.8,-0.4 0.8,0.4, height 0.95
"SMD Inductor [1812]" [mm]
  rect 1.65x1.3 smd: 1(-2.05,0) 2(2.05,0)
  silkscreen extent -2.25,-1.6 2.25,1.6, body extent -2.25,-1.6 2.25,1.6, height 3.4
"SMD M7 Rectifier" [mm]
  rrect15% 2.21x1.53 smd: A(2.05,0) C(-2.05,0)
  silkscreen extent -3.85,-1.45 2.65,1.45, body extent -2.52,-1.35 2.53,1.35, height 2.37
"SMD Mosfet (Part #: PMV48XP)" [mm]
  rect 0.9x0.8 smd: 1(-1,0.95) 2(-1,-0.95) 3(1,0)
  silkscreen extent -2.1,-1.45 0.65,1.45, body extent -1.15,-1.45 1.15,1.45, height 1.1
"SMD Resistor [1210]" [mm]
  rect 1.23x2.76 smd: 1(-1.466,0) 2(1.466,0)
  silkscreen extent -0.53,-1.38 0.53,1.38, body extent -1.6,-1.25 1.6,1.25, height 0.6
"SMD Resistor [3921]" [mm]
  rect 2.7x5.6 smd: 1(-4.15,0) 2(4.15,0)
  silkscreen extent -5.71,-3.2 5.71,3.2, body extent -5,-2.6 5,2.6, height 1.8
"SMD Varistor [0603]" [mm] "CG0603MLC-05E"
  rrect25% 0.87x1.02 smd: 1(-0.78,0) 2(0.78,0)
  silkscreen extent -0.8,-0.83 0.8,0.83, body extent -0.8,-0.4 0.8,0.4, height 0.53
"Solderable Jumper" [mil]
  round 1 smd: 1(-30.71,0) 2(30.71,0)
  Top Layer region: -8.9,-23.62 -8.9,23.62 -28.9,23.62 -28.9,23.62 -39.15,21.28 -47.37,14.73 -51.93,5.26 -51.93,-5.26 -47.37,-14.73 -39.15,-21.28 -28.9,-23.62 -28.9,-23.62
  Top Layer region: 8.9,-23.62 8.9,23.62 28.9,23.62 28.9,23.62 39.15,21.28 47.37,14.73 51.93,5.26 51.93,-5.26 47.37,-14.73 39.15,-21.28 28.9,-23.62 28.9,-23.62
  silkscreen extent -65,-35 65,35
"Thru-Hole 16MHz Oscillator" [mm] "Part #: 2780-HC49US-FF3F18-16.000MHZ-ND"
  round 1.55 hole 0.8: 1(-2.44,0) 2(2.44,0)
  silkscreen extent -5.55,-2.35 5.55,2.35, body extent -5.75,-2.5 5.75,2.5, height 3.8
"Thru-Hole Polarized Cap [3.5mm]" [mm]
  round 1.275 hole 0.85: 1(-1.75,0.018)
  rect 1.275x1.275 hole 0.85: 2(1.75,0.018)
  silkscreen extent -4,-3.98 4,4.02, body extent -4.24,-4.25 4.24,4.25, height 13
"Thru-Hole Pushbutton" [mm] "(Regular pushbutton)"
  round 1.5 hole 1: 1(-3.25,2.25) 2(3.25,2.25) 3(-3.25,-2.25) 4(3.25,-2.25)
  silkscreen extent -4.6,-3 3,3, body extent -3.85,-3 3.85,3, height 4.95
"USB Type-B Female (Thru-Hole)" [mm] "USB-B-S-F-B-TH"
  round 1.408 hole 0.9: 1(1.25,7) 2(-1.25,7) 3(-1.25,5)
  rect 1.408x1.408 hole 0.9: 4(1.25,5)
  round 3.316 hole 2.3: S1(-6.02,2.3) S2(6.02,2.3)
  silkscreen extent -6.05,-8.1 6.85,8.1, body extent -7.25,-8.1 7.25,8.4, height 10.7

## Part data
C1 C3 C4 C7 C8 C9 C11 C12 C14 C17 C18 C19 C23: Capacitance=100nF, Size Package=1210
  C1 C3 C4 C8 C9 C11 C12 C14 C17 C18 C19 C23: Mouser Part #=581-12107C104KAT2A
C2 C24: Capacitance=1uF, Size Package=1210, Mouser Part #=581-12107C104KAT2A
C5 C6 C13: Capacitance=22pF, Size Package=1210, Mouser Part #=77-VJ1210A220JXGAT5Z
C10: Capacitance="10nF (0.01uF)", Size Package=1210, Mouser Part #=810-CGA6P1C0G3B103G2
C15: "Diameter: 4mm", Capacitance=22uF, Diameter=4mm, Mouser Part #=667-EEE-FN1C220R
C16: "Diameter: 4mm", Capacitance=1uF, Diameter=4mm, Mouser Part #=80-EXV105M050A9BAA
C20: Capacitance=1000uF, Mouser Part #=594-MAL214236102E3, Pin Spacing=5mm
C21: "Diameter: 4mm", Capacitance=100uF, Diameter=4mm, Mouser Part #=667-EEE-FT0J101AR
C22: Capacitance="0.47uF (470nF)", Size Package=1210, Mouser Part #=581-KAF32GR71H105KU
D1 D2: "Part #: CD1206-S01575 / JLC Part #: C75465", JLC Part #=C75465, Size Package=1206
D3: "JLC Part #: C95872", JLC Part #=C95872
D5 D7 D8: library part "Small LED", "3mm LED", Color=Yellow
D6: library part "Small LED", "3mm LED", Color=Green
D9: library part "1N5822 Schottky Diode", Mouser Part #=511-1N5822
F1: "Part #: MF-MSMF050-2 / JLC Part #: C17313", JLC Part #=C17313, Size Package=1812
F2: "Standard Fuse Socket", Capacity=20A, Mouser Part #=576-178.6165.0002
J1 J2 J3: "Solderable jumper"
L1: "JLC Part #: C840593 (default)", JLC Part #=C840593, Res @ Freq="30 @ 100MHz", Size Package=0805
L2: Inductance=10uH, Size Package=1210, Mouser Part #=963-LBC3225T100KR
L3: Inductance=100uH, Size Package=1812, Mouser Part #=70-ISC1812ER101J
O1: "Part #: 2780-HC49US-FF3F18-16.000MHZ-ND (16MHz) / JLC Part #: C6873445", JLC Part #=C6873445
O2: library part "SMD 16MHz Oscillator [1]", "Part #: CSTNE16M0V530000R0 / JLC Part #: C341521", JLC Part #=C341521
P1 P2: "Header, 3-Pin, Dual row", LatestRevisionDate=17-Jul-2002, LatestRevisionNote="Re-released for DXP Platform.", Publisher="Altium Limited"
P4: library part "Screw Terminal [4pin]"
Q1: "JLC Part #: C2959854", JLC Part #=C2959854
R1 R8 R9 R11 R12 R13 R18: "JLC Part #: C728401 / (for 1M Ohm Res)", Resistance=10k, Size Package=1210, Mouser Part #=71-CRCW121010K0JNAIF
R2 R3 R4: "JLC Part #:", Resistance=1K, Size Package=1210, Mouser Part #=71-CRCW12101K00JNAIF
R5 R6: "JLC Part #:", Resistance=22, Size Package=1210, Mouser Part #=71-CRCW121022R0JNEAH
R7 R10: "JLC Part #: C728401 / (for 1M Ohm Res)", JLC Part #=C728401, Resistance=1M, Size Package=1210, Mouser Part #=71-CRCW12101M00FKEAH
R14 R15 R16 R17: "JLC Part #: C728401 / (for 1M Ohm Res)", Resistance=220, Size Package=1210, Mouser Part #=71-CRCW1210220RJNEAH
R19: "JLC Part #: C728401 / (for 1M Ohm Res)", JLC Part #=C728401, Resistance=9.53k, Size Package=1210, Mouser Part #=ERJ-14NF9531U
S1: "Tactile 4pin SPST Pushbutton / (what I expect is a regular pushbutton)"
SEG1: Color=Red, Mouser Part #=474-COM-11405
SR1: JLC Part #=C728401, Resistance=0.0002, Size Package=3921, Mouser Part #=71-WSL3921L2000FEA
U1: "JLC Part #: C507117", JLC Part #=C507117
U2: "JLC Part #: C22460", JLC Part #=C22460
U3: "Part #: LMV358IDGKR", JLC Part #=C105242
U4: "Part #: LP2985-33DBVR / JLC Part #: C95414", JLC Part #=C95414, Mouser Part #=595-LP2985-33DBVR
U5: library part "LTC2959 Battery Monitor IC", Mouser Part #=584-LTC2959IDDBTRMPB
U6: library part "LM2576 Step Down Converter"
U7: library part "DIP IC [24pin]", Mouser Part #=700-MAX7219ENG
X1: "Part #: USB-B-S-F-B-TH / JLC Part #: C5714571 / OUT OF STOCK JLC", JLC Part #=C5714571
X2 X3: library part "Screw Terminal [1996236]", Mouser Part #=651-1996236
Z1 Z2: "JLC Part #: C840634 (for 0603 size)", JLC Part #=C840634, Size Package=0603

## Free pads (board coordinates)
  round 5.08 hole 3.4: X(4.5,4.5) X(4.5,91.5) X(93.5,4.5) X(93.5,91.5)

## Via types
v1: diameter 0.75, hole 0.4, Top Layer to Bottom Layer, 153 vias

## Nets (pads, with @x,y where several pads share a name; then routed paths per layer and width w, separated by ;. In a path a pad name is that pad's centre, name@x,y a point inside that pad or via, vN(x,y) a via of type N, cw(c..) or ccw(c..) an arc to the next point about the centre after c; other vN are vias at no path point)
16U2_AVCC: C3.2 C7.2 C11.2 C12.2 C14.2 C19.2 C20.1 D1.C D2.C L2.2 L3.2 P1.2 P2.2 P4.1 P4.2 R1.2 R8.2 R11.2 R12.2 R13.2 R14.2 R15.2 R17.2 R18.1 R19.1 U1.4 U1.32 U2.10 U2.31 U2.61 U2.80 U3.8 U6.4 U7.19 | length 445.7
  Top Layer w0.175: U1.32@16.791,25.681 16.791,27.151 16.129,27.813 v1(16.129,28.956) 16.624,29.451 U1.4@18.161,29.451 ; v1(19.558,25.908) 21.59,23.876 21.59,21.968 C3.2@21.097,21.475 ; C3.2@20.72,21.475 C3.2@21.097,21.475 ; C3.2@21.5,21.475 C3.2@21.097,21.475 ; U3.8@32.15,3.475 32.15,5.082 v1(33.926,6.858) ; C7.2@33.909,10.59 33.926,10.573 v1(33.926,6.858) ; R8.2@38,9.966 37.235,9.966 34.237,6.968 34.036,6.968 v1(33.926,6.858) ; R17.2@46.01,27.744 47.937,27.744 v1(48.514,28.321) ; v1(48.514,25.019) 49.022,25.527 L2.2@50.215,25.527 ; C14.2@50.991,20.034 C14.2@51,20.025 51.493,19.532 52.985,19.532 53.467,19.05 54.77,19.05 U2.10@54.82,19 ; U7.19@54.3,78.994 54.3,75.38 R19.1@54.496,75.184 53.969,74.657 53.969,73.273 52.959,72.263 52.959,70.104 v1(53.721,69.342) 53.877,69.342 54.225,68.994 55.473,68.994 R18.1@56,68.466 ; v1(55.245,5.842) 55.355,5.732 55.621,5.732 56.878,4.475 C11.2@57.658,4.475 57.658,6.393 59,7.735 U2.31@59,9.82 ; U6.4@66.2,54.5 66.2,53.053 66.548,52.705 68.326,52.705 69.088,51.943 69.088,49.213 67,47.125 L3.2@67,46.95 ; U2.80@66.5,25.18 66.5,27.242 66.992,27.735 C19.2@67.183,27.735 67.486,27.432 v1(76.073,27.432) ; v1(67.818,1.524) 69.964,1.524 R11.2@70,1.56 73.865,1.56 D2.C@74,1.695 ; U2.61@70.18,16.5 72.707,16.5 C12.2@73.2,16.993 ; v1(71.628,15.621) v1@71.764,15.621 ; R12.2@72.707,12.993 73.235,12.466 R12.2@74,12.466 ; C12.2@72.855,15.875 73.2,16.22 C12.2@73.2,16.993 ; C12.2@73.2,17 C12.2@73.2,16.993
  Top Layer w0.3: R1.2@1.767,40.5 1.767,43.867 2.5,44.6 3.844,44.6 4.583,45.339 6.604,45.339 v1(8.001,43.942) ; R14.2@41,20.034 R15.2@46.01,20.034 C14.2@50.991,20.034 ; v1(71.628,15.621) 73.618,13.631 73.618,12.848 R12.2@74,12.466 R13.2@78,12.466 ; v1@71.764,15.621 72.018,15.875 C12.2@72.855,15.875
  Top Layer w0.8: P1.2@2.286,30.607 3.81,29.083 v1(8.128,29.083) ; v1(64.643,45.466) 65.607,46.43 66.655,46.43 67,46.775 L3.2@67,46.95
  PWR Layer w0.8: v1(8.001,43.942) 8.001,29.21 v1(8.128,29.083) 16.002,29.083 v1(16.129,28.956) 16.51,28.956 v1(19.558,25.908) ; v1@19.643,25.823 30.734,25.823 ; P2.2@30.734,21.717 30.734,25.823 ; v1(33.926,6.858) 54.229,6.858 v1(55.245,5.842) ; 51.689,6.985 51.689,13.589 ; C20.1@51.943,47.371 53.848,45.466 59.055,45.466 ; v1(53.721,69.342) 53.721,64.389 59.055,59.055 59.055,45.466 ; P4.1@55.34,91.821 61.182,85.979 66.521,85.979 ; P4.2@60.42,91.821 60.679,91.821 66.521,85.979 ; v1(64.643,45.466) 59.055,45.466 ; v1(67.818,1.524) 67.056,1.524 63.627,4.953 63.627,13.589 ; v1(71.628,15.621) 69.215,15.621 67.183,13.589 63.627,13.589 ; 30.734,25.823 31.411,26.5 48.514,26.5 ; 48.514,26.5 v1(48.514,28.321) 53.086,32.893 53.086,39.497 59.055,45.466 ; 48.514,26.5 v1(48.514,25.019) v1(48.514,20.066) 51.689,16.891 51.689,13.589 ; 51.689,13.589 63.627,13.589 ; 63.627,13.589 63.627,14.986 v1(76.073,27.432) 81.026,32.385 81.026,80.899 75.946,85.979 66.521,85.979
16U2_UCAP: C2.2 U1.27 | length 7.5
  Top Layer w0.175: C2.2@8,21.475 8.78,21.475 9.272,21.968 9.272,23.242 9.906,23.876 11.446,23.876 12.791,25.221 U1.27@12.791,25.681
2959_GPIO: R18.2 U2.7 U5.8 | length 60.5
  Top Layer w0.175: U5.8@52.95,60 54.666,60 ; U2.7@54.82,20.5 57.224,20.5 v1@57.277,20.447 ; R18.2@56,65.534 56,61.334 54.666,60 ; v1(61.976,56.261) 62.132,56.261 62.489,56.619 62.667,56.619 62.865,56.816 62.865,59.182 62.047,60 54.666,60
  GND Layer w0.175: v1(61.976,29.718) v1(61.976,56.261)
  Bottom Layer w0.175: v1(57.15,20.5) 57.965,20.5 58.801,21.336 58.801,23.622 61.976,26.797 v1(61.976,29.718)
+3V3: C15.1 P5.1 U3.5 U4.5 | length 165.1
  Top Layer w0.175: v1(30.099,1.651) 30.988,1.651 31.114,1.525 U3.5@32.15,1.525 ; C15.1@42.375,15.7 C15.1@42.8,15.7
  Top Layer w0.4: v1(32.893,15.748) 40.027,15.748 41.225,14.55 ; U4.5@39.255,14.55 41.225,14.55 ; C15.1@42.375,15.7 41.225,14.55
  PWR Layer w0.4: v1(30.099,1.651) 30.099,1.746 30.353,2 30.353,16.51 ; v1(32.893,15.748) 32.131,16.51 30.353,16.51 ; P5.1@41.148,91.821 41.148,90.043 39.243,88.138 9.144,88.138 4.064,83.058 4.064,53.594 6.731,50.927 6.731,17.78 8.001,16.51 30.353,16.51
AREF: C18.2 U2.98 | length 3.8
  Top Layer w0.175: U2.98@57.5,25.18 57.533,25.213 57.533,26.243 58.164,26.873 58.164,27.242 58.656,27.735 C18.2@59.436,27.735
AVCC: C17.2 L2.1 U2.100 | length 7.9
  Top Layer w0.175: L2.1@51.785,25.527 56.447,25.527 56.5,25.475 U2.100@56.5,25.18 ; C17.2@55.245,27.735 55.245,26.892 56.245,25.893 56.447,25.893 56.5,25.84 U2.100@56.5,25.527
Battery+: D3.A F2.1 SR1.1 U5.5 | length 11.5
  Top Layer w0.175: D3.A@49.657,53.848 49.657,57.882 50.775,59 U5.5@51.05,59
  Top Layer w0.8: 44.069,53.848 D3.A@49.657,53.848
  other v1: 39.664,54 42.164,54 39.664,55.5 42.164,55.5 39.664,57 42.164,57
CF+: C22.1 U5.3 | length 4.7
  Top Layer w0.175: C22.1@47,61.475 47.78,61.475 49.255,60 U5.3@51.05,60
CF-: C22.2 U5.4 | length 4.5
  Top Layer w0.175: C22.2@47,58.525 49.036,58.525 50.011,59.5 U5.4@51.05,59.5
D+: R6.2 U1.30 | length 5
  Top Layer w0.175: U1.30@15.191,25.681 15.191,24.433 17.02,22.604 R6.2@17.02,21.466
D-: R5.2 U1.29 | length 5.4
  Top Layer w0.175: R5.2@12.52,21.466 13.285,21.466 13.812,21.994 13.812,23.464 14.351,24.003 14.351,25.641 U1.29@14.391,25.681
D_DIG_0: SEG1.12 U7.2 | length 55.8
  Top Layer w0.175: U7.2@64.46,71.374 66.111,69.723 81.534,69.723 90.17,61.087 90.17,41.656 93.98,37.846 SEG1.12@94.947,37.846
D_DIG_1: SEG1.9 U7.11 | length 69.6
  Top Layer w0.175: v1@73.677,73.262 v1(73.787,73.152)
  PWR Layer w0.175: U7.11@41.6,71.374 43.505,73.279 73.66,73.279 v1(73.787,73.152) ; v1(83.566,62.103) 92.075,53.594 92.075,48.338 SEG1.9@94.947,45.466
  Bottom Layer w0.175: v1(73.787,73.152) 79.502,67.437 79.502,66.167 v1(83.566,62.103)
D_DIG_2: SEG1.8 U7.6 | length 52.9
  PWR Layer w0.175: v1(83.058,64.262) 93.472,53.848 93.472,49.481 SEG1.8@94.947,48.006
  GND Layer w0.175: U7.6@54.3,71.374 55.951,69.723 77.597,69.723 v1(83.058,64.262)
D_DIG_3: SEG1.6 U7.7 | length 44.4
  PWR Layer w0.175: U7.7@51.76,71.374 53.03,72.644 72.771,72.644 73.787,71.628 v1(73.787,70.866)
  Bottom Layer w0.175: SEG1.6@72.947,50.546 73.025,50.624 73.025,69.85 73.677,70.502 73.677,70.756 v1(73.787,70.866)
D_ISET: R19.2 U7.18 | length 3.9
  Top Layer w0.175: R19.2@51.564,75.184 51.76,75.38 U7.18@51.76,78.994
"D_LOAD (C\S\\)": U2.78 U7.12 | length 85.7
  Top Layer w0.175: U2.78@67.5,25.18 67.5,26.352 67.691,26.543 v1(70.358,26.543)
  Bottom Layer w0.175: U7.12@39.06,71.374 41.346,73.66 49.935,73.66 50.122,73.474 50.122,62.623 45.847,58.349 45.847,40.767 48.641,37.973 66.894,37.973 70.358,34.509 v1(70.358,26.543)
D_Seg_A: SEG1.11 U7.14 | length 98.1
  Top Layer w0.175: U7.14@41.6,78.994 41.6,80.335 43.307,82.042 94.742,82.042 96.393,80.391 96.393,41.832 SEG1.11@94.947,40.386